# EAGLE board J2 Retrofit V2.1 (EAGLE 9.1.2)
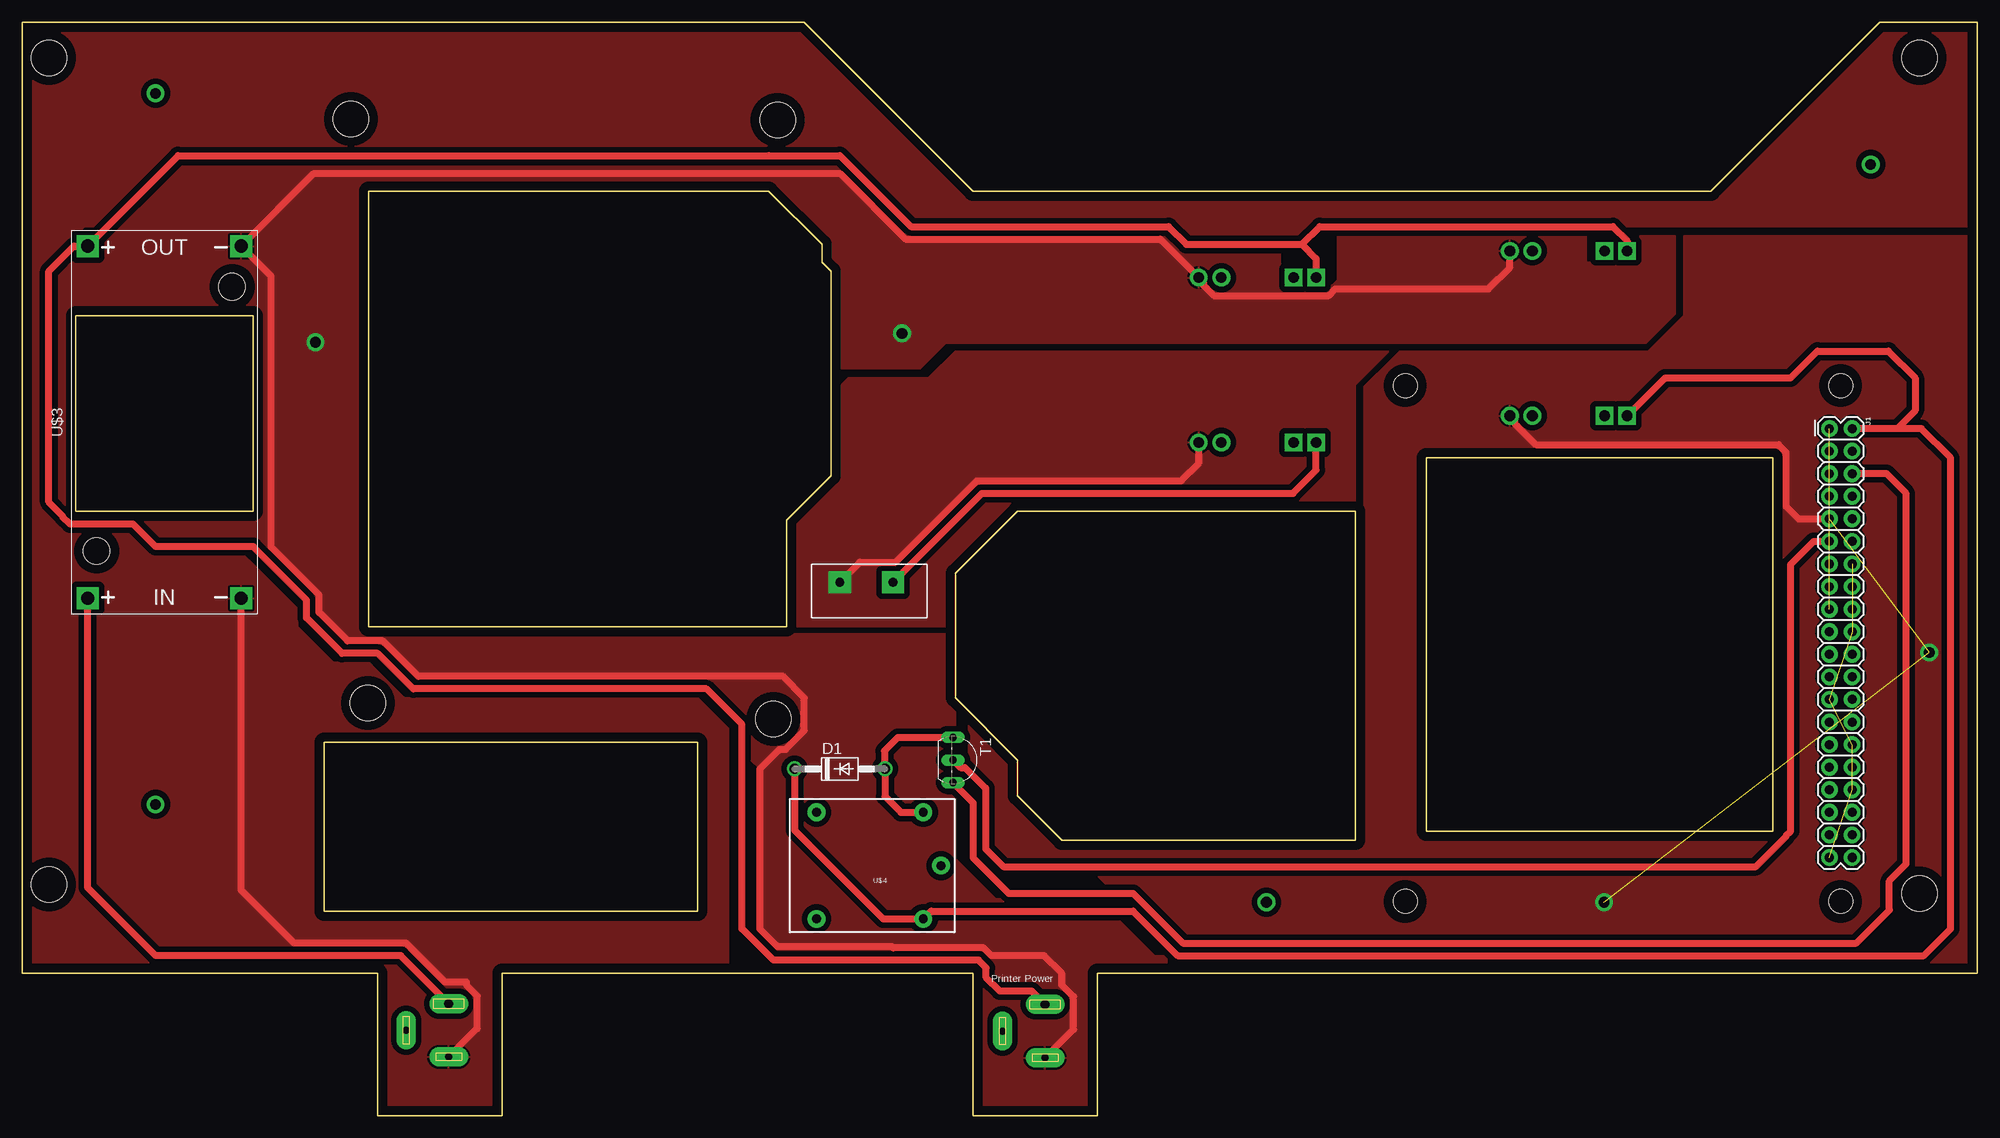
[diagram p0: board, top side]
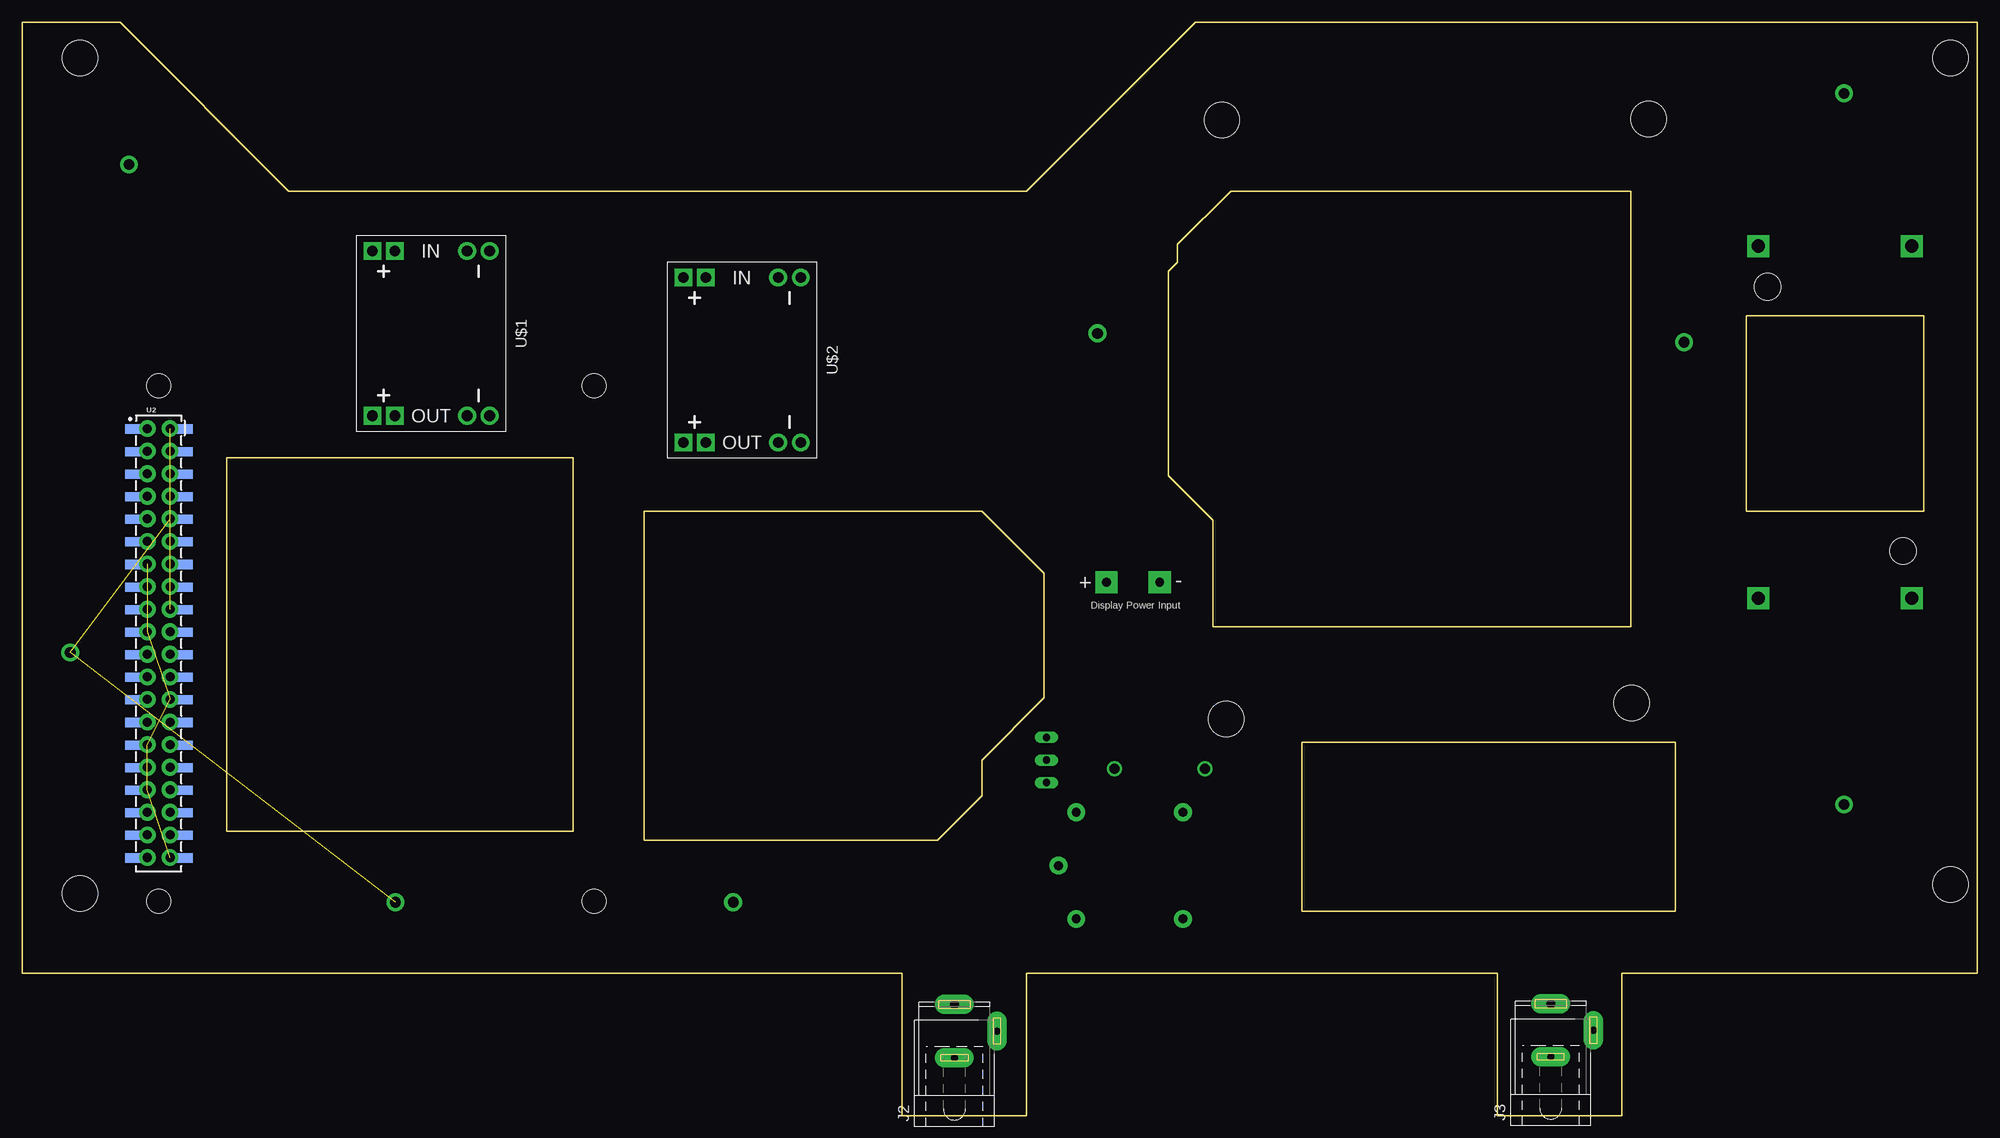
[diagram p1: board, bottom side, seen from below]

Size 220 x 123 mm. Coordinates in mm from the lower left corner, seen from the top.
Outline: 0,16 0,123 88,123 107,104 190,104 209,123 220,123 220,16 121,16 121,0 107,0 107,16 54,16 54,0 40,0 40,16 0,16
Outline: 39,104 84,104 90,98 90,96 91,95 91,72 86,67 86,55 39,55 39,104
Outline: 158,74 197,74 197,32 158,32 158,74
Outline: 6,90 26,90 26,68 6,68 6,90
Outline: 34,42 76,42 76,23 34,23 34,42
Outline: 150,68 112,68 105,61 105,47 112,40 112,36 117,31 150,31 150,68
Copper layers (1*16): Top 0.035mm / dielectric 1.5mm / Bottom 0.035mm
Design rules "default": minimum track width 6mil, minimum drill 0.35mm, track to track 6mil, track to pad 6mil, pad to pad 6mil, via to via 6mil, smd to smd 6mil, copper to edge 40mil, drill to drill 6mil, minimum pad ring 10mil, minimum via ring 8mil, stop-mask expansion 4mil, vias tented up to drill 0mil, thermal gap 10mil
Net classes: 0 default: width 0.762 mm, drill 0.762 mm, clearance 0.635 mm
Holes 4 mm at 3,26 3,119 213.5,119 213.5,25 38.9,46.4 84.5,44.6 37,112.1 85,112

## Footprints (pad centres in the part's own frame; a part is rotated, then mirrored left to right if it is on the bottom)
DO41-10 = drill 1.118: A 5.08,0; C -5.08,0
2X20 = drill 1.016 pad 1.88: 1 0,0; 2 0,2.54; 3 2.54,0; 4 2.54,2.54; 5 5.08,0; 6 5.08,2.54; 7 7.62,0; 8 7.62,2.54; 9 10.16,0; 10 10.16,2.54; 11 12.7,0; 12 12.7,2.54; 13 15.24,0; 14 15.24,2.54; 15 17.78,0; 16 17.78,2.54; 17 20.32,0; 18 20.32,2.54; 19 22.86,0; 20 22.86,2.54; 21 25.4,0; 22 25.4,2.54; 23 27.94,0; 24 27.94,2.54; 25 30.48,0; 26 30.48,2.54; 27 33.02,0; 28 33.02,2.54; 29 35.56,0; 30 35.56,2.54; 31 38.1,0; 32 38.1,2.54; 33 40.64,0; 34 40.64,2.54; 35 43.18,0; 36 43.18,2.54; 37 45.72,0; 38 45.72,2.54; 39 48.26,0; 40 48.26,2.54
SPC4078 = drill 0.8 pad 2.184 long: 1 -3,0; 2 0,-4.8 | drill 1 pad 2.184 long: 3 3,0
TO92-EBC-OVAL = drill 0.813 long: B 0,-1.27; C 2.54,-1.27; E -2.54,-1.27
RASPBERRY_PI_SHIELD_HOLES = smd 1.02 x 1.87: 1 8.382,7.686; 2 8.382,1.929; 3 10.922,7.686; 4 10.922,1.929; 5 13.462,7.686; 6 13.462,1.929; 7 16.002,7.686; 8 16.002,1.929; 9 18.542,7.686; 10 18.542,1.929; 11 21.082,7.686; 12 21.082,1.929; 13 23.622,7.686; 14 23.622,1.929; 15 26.162,7.686; 16 26.162,1.929; 17 28.702,7.686; 18 28.702,1.929; 19 31.242,7.686; 20 31.242,1.929; 21 33.782,7.686; 22 33.782,1.929; 23 36.322,7.686; 24 36.322,1.929; 25 38.862,7.686; 26 38.862,1.929; 27 41.402,7.686; 28 41.402,1.929; 29 43.942,7.686; 30 43.942,1.929; 31 46.482,7.686; 32 46.482,1.929; 33 49.022,7.686; 34 49.022,1.929; 35 51.562,7.686; 36 51.562,1.929; 37 54.102,7.686; 38 54.102,1.929; 39 56.642,7.686; 40 56.642,1.929 | hole 2.75: 3.512,4.775; 61.512,4.775; 61.512,53.775; 3.512,53.775
DC-DC-STEP-DOWN-MP1584 = drill 1.2 pad 2 square: IN+.1 -9.271,-4.064; IN+.2 -9.271,-6.604; OUT+.1 9.271,-4.064; OUT+.2 9.271,-6.604 | drill 1.2 pad 2: IN-.1 -9.271,6.604; IN-.2 -9.271,4.064; OUT-.1 9.271,6.604; OUT-.2 9.271,4.064
DC-DC-STEP-DOWN-LM2596 = drill 1.5 pad 2.5 square: IN+ -19.812,8.636; IN- -19.812,-8.636; OUT+ 19.812,8.636; OUT- 19.812,-8.636 | hole 3: -14.478,7.62; 15.24,-7.62
SRD-05VDC-SL-C = drill 1 pad 2: COIL0 -5.39,-6.12; COIL1 -5.39,5.88; SWCLOSED 6.61,-6.12; SWCOMMON -7.39,-0.12; SWOPEN 6.61,5.88

## Placement (x,y rotation side)
D1  1N4004  [DO41-10]  92,39 0 top
J1  RASPBERRYPI-40-PIN-GPIO_PTH_NO_SHROUD  [2X20]  203.37,77.29 270 top
J2  [SPC4078]  115.1,9.5 90 bottom
J3  [SPC4078]  48,9.6 90 bottom
T1  2N2222  [TO92-EBC-OVAL]  106,40 270 top
U2  RASPBERRY_PI_40SMD  [RASPBERRY_PI_SHIELD_HOLES]  209.41,85.62 270 bottom
U$1  DC-DC-STEP-DOWN-MP1584  [DC-DC-STEP-DOWN-MP1584]  174,88 270 bottom
U$2  DC-DC-STEP-DOWN-MP1584  [DC-DC-STEP-DOWN-MP1584]  139,85 270 bottom
U$3  DC-DC-STEP-DOWN-LM2596  [DC-DC-STEP-DOWN-LM2596]  16,78 90 top
U$4  RELAYPTH  [SRD-05VDC-SL-C]  96,28 180 top

## Library data of the parts
D1 = diode
J1 U2 = SparkFun-Connectors
J2 J3 = con-jack; OC_FARNELL: unknown; OC_NEWARK: unknown
T1 = adafruit
U$1 = GHIdiy-modules
U$2 U$3 = diy-modules
U$4 = SRD-Relay

## Nets
3.3V: J1.1 J1.17
5V: J1.4
GND: J1.14 J1.20 J1.25 J1.30 J1.34 J1.39
N$1: J3.1 U$3.IN-
N$2: U$2.OUT-.1
N$3: J3.3 U$3.IN+
N$4: U$2.OUT+.2
N$5: J2.3 U$1.IN+.2 U$2.IN+.2 U$3.OUT+
N$6: J1.11 T1.B
N$7: J1.6 T1.C
N$8: J2.1 U$1.IN-.1 U$2.IN-.1 U$3.OUT-
N$9: D1.C J1.2 U$1.OUT+.2 U$4.COIL1
N$10: J1.9 U$1.OUT-.1
N$11: D1.A T1.E U$4.COIL0

## Tracks (layer width: path | path; a pad name or v marks a point on that pad's centre or on a via)
3.3V  (1 unrouted)
GND  (5 unrouted)
N$1
  Top 0.762: J3.1 51.2,9.8 51.2,13.47 50,14.67 50,15 47.58,15 43.18,19.4 30.6,19.4 24.64,25.36 U$3.IN-
  pour Top: 80,16 79.5,16 79.5,43.5 79,44 76,47 74,47 43,47 39,51 38,51 35,51 31,55 31,57 26,62 25,63 15,63 12,66 9,66 5,66 2,69 2,71 2,95 4,97 6,99 7,100 8,100 17,109 24,109 92,109 100,101 129,101 130,100 131,99 144,99 146,101 179,101 180,100 226,100 227,101 227,124 221,130 218,133 -2,133 -2,-2 59,-2 61,0 64,0
N$2  (via drill 1 pad 2.5)
  Top 0.762: v92,60 94.27,62.27 98.29,62.27 107.42,71.4 130.4,71.4 132.4,73.4 U$2.OUT-.1
  pour Top: 86,55 105,55 105,61 112.2,68.2 150,68.2 150,81 150,82.2 153.8,86 105,86 102,83 93,83 91,81 91,72 86,67
N$3
  Top 0.762: J3.3 42.6,18 15,18 7.36,25.64 U$3.IN+
N$4  (via drill 1 pad 2.5)
  Top 0.762: v98,60 108,70 143,70 145.6,72.6 U$2.OUT+.2
N$5
  Top 0.762: 36,52 40,52 41,51 44,48 77,48 81,44 81,21 84.53,17.47 107.61,17.47 108.47,16.61 108.47,15.53 110,14 113.6,14 J2.3 | 36,52 | 36,52 32,56 32,58 26,64 22,64 15,64 12.47,66.53 5.39,66.53 4.53,67.39 4.53,67.47 3,69 3,95 5.81,97.81 U$3.OUT+ 17.55,108 84,108 92,108 98,102 100,100 129,100 131,98 144,98 | U$2.IN+.2 145.6,96.4 144,98 | 144,98 | 144,98 146,100 179,100 180.6,98.4 U$1.IN+.2
N$6
  Top 0.762: T1.B 105.59,39.14 106.08,39.14 108.4,36.82 108.4,30 110.4,28 195.08,28 198.47,31.39 198.47,31.47 199,32 199,62 201.59,64.59 J1.11
N$7
  Top 0.762: T1.C 107,35.19 107,29 111,25 125,25 130.6,19.4 206.4,19.4 210.1,23.1 210.1,26.41 212,28.3 212,70 209.79,72.21 J1.6
N$8  (via drill 1.2 pad 2)
  Top 0.762: J2.1 118.3,9.7 118.3,13.37 117,14.67 117,16 115,18 109.06,18 108.19,18.87 98,18.87 97.87,19 84.98,19 83,20.98 83,39 85.2,41.2 85.91,41.2 88,43.3 88,47 85.6,49.4 44.58,49.4 40.58,53.4 36.6,53.4 33.4,56.6 33.4,58.58 28,63.98 28,94.45 U$3.OUT- 32.82,106 92.02,106 99.42,98.6 128.06,98.6 U$2.IN-.1 132.92,93.75 132.92,93.44 134.1,92.25 147.03,92.25 147.77,93 165,93 167.4,95.4 U$1.IN-.1
  other vias: 33,87 99,88
  pour Top: 31,107 18,107 9,98 9,97 9,96 5,96 4,95 4,69 6,67 13,67 15,65 26,65 33,58 33,57 37,53 40,53 44,49 77,49 82,44 82,40 83,39 83,16 107,16 107,0 121,0 121,16 128.8,16 128.8,18 127.4,18 125.4,20 124.2,21.2 121,24.4 109.5,24.4 105,28.9 105,33 105,42 105,54 105.2,54.2 85.8,54.2 39,54.2 39,104 84,104 90,98 90,96 91,95 91,84 101,84 103,86 103.9,86.9 182.7,86.9 186,90.2 186,99 182,99 182,96 176,96 176,99 148,99 148,94 147,93 141.6,93 141.6,97.2 130.8,97.2 129,99 100,99 92,107
N$9
  Top 0.762: D1.C 86.92,32.08 96.88,22.12 U$4.COIL1 102.27,23 125,23 130,18 214,18 217,21 217,74 213.71,77.29 211,77.29 | 211,77.29 J1.2 | U$1.OUT+.2 184.88,83 199,83 202,86 210,86 213,83 213,79.29 211,77.29
N$10  (via drill 1.2 pad 2)  (2 unrouted)
  Top 0.762: U$1.OUT-.1 167.92,78.2 167.92,77.89 170.34,75.47 197.61,75.47 198.47,74.61 198.47,68.53 199.87,67.13 J1.9
  other vias: 214.6,52.1 178,24
  pour Top: 120,28 132,16 146,16 220,16 229,25 229,97 227,99 221,99 187,99 187,90 183,86 181,86 155,86 154,85 151,82 151,80 151,68 150,67 137,54 136,54 106.5,54 106.5,31.5 110,28
N$11
  Top 0.762: T1.E 98.54,42.54 97,41 97.08,40.92 D1.A 97.08,35.92 98.88,34.12 U$4.COIL0
N$12  (via drill 1.2 pad 2)
  other vias: 15,115
N$13  (via drill 1.2 pad 2)
  other vias: 15,35
N$14  (via drill 1.2 pad 2)
  other vias: 140,24
N$15  (via drill 1.2 pad 2)
  other vias: 208,107

## Text on the board
tNames: Printer Power
bNames: - | + | Display Power Input